# Altium PCB PCB1.PcbDoc
Units mm, origin at the board's own origin, x right, y up, seen from the top; angles counter-clockwise.
Board outline 152.4 x 101.6 mm, 2 copper layers (Top Layer, Bottom Layer); 18 components, 9 nets, 37 pads, 0 vias.
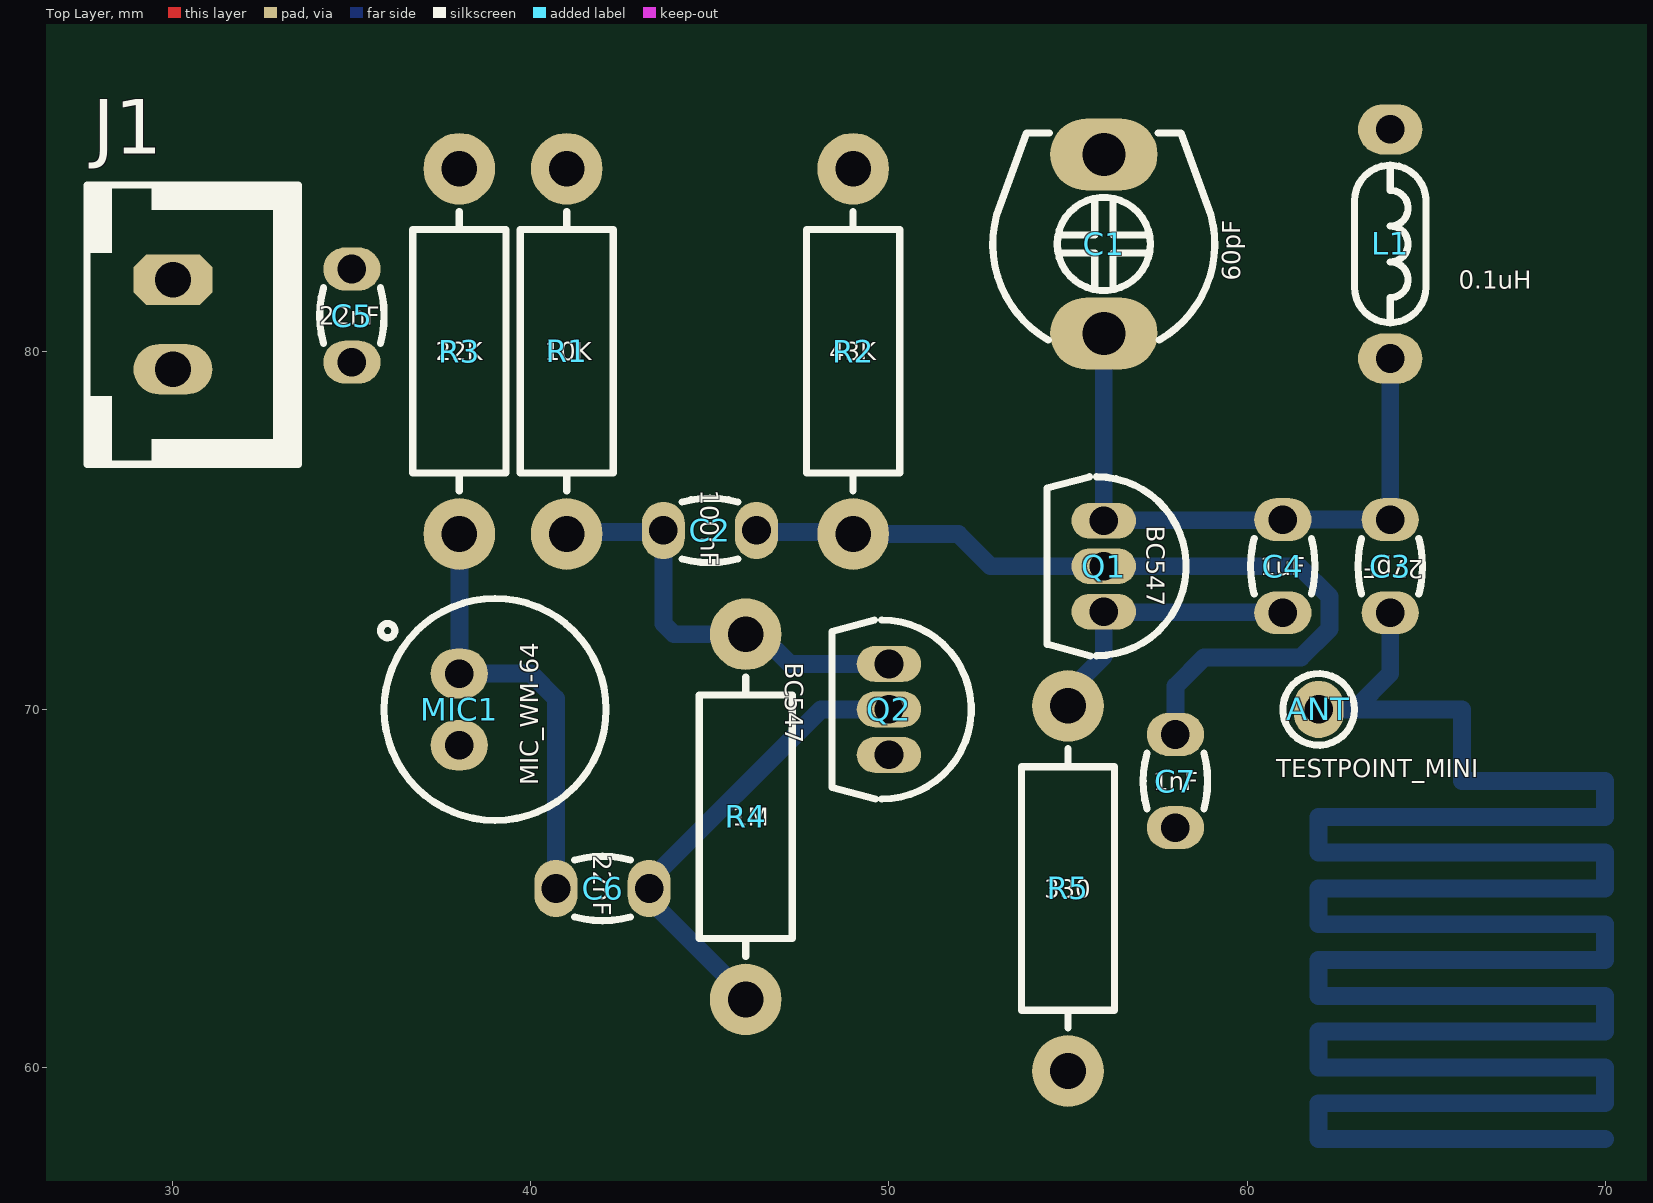
[diagram p0: Top Layer view]
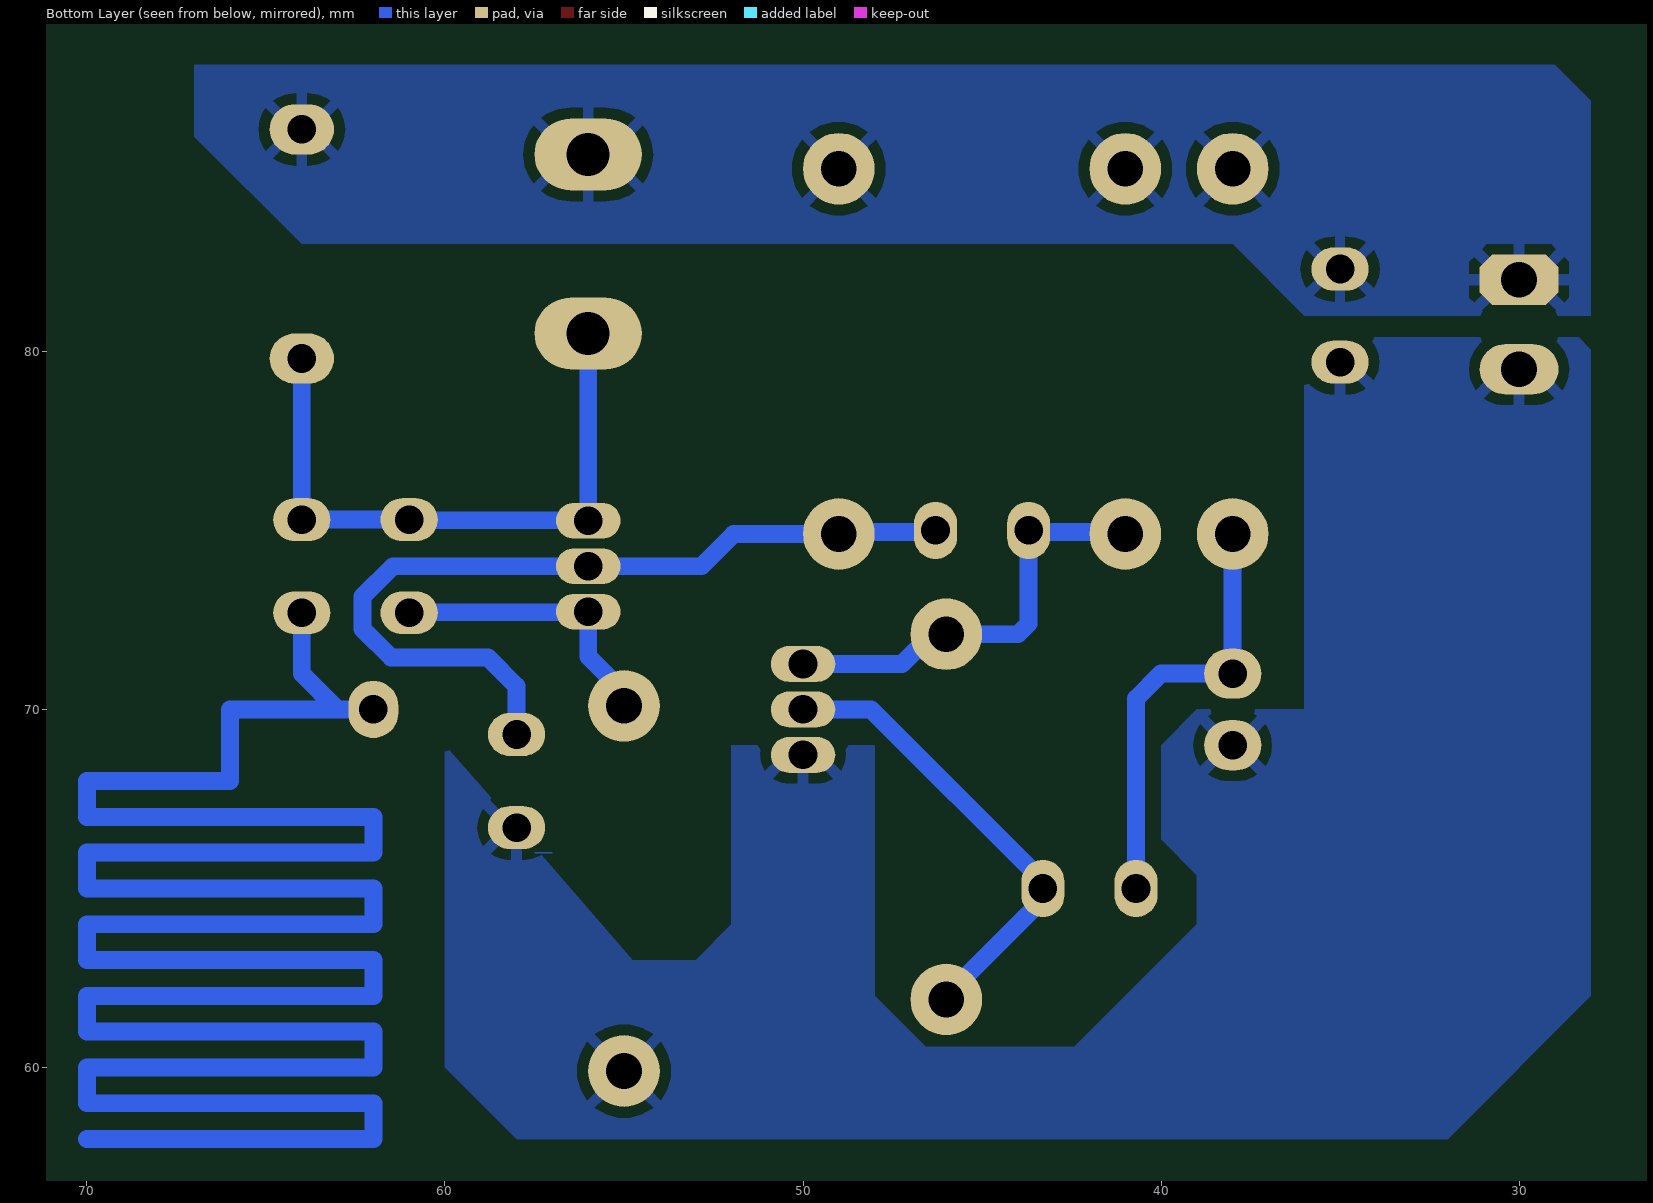
[diagram p1: Bottom Layer view, seen from below]
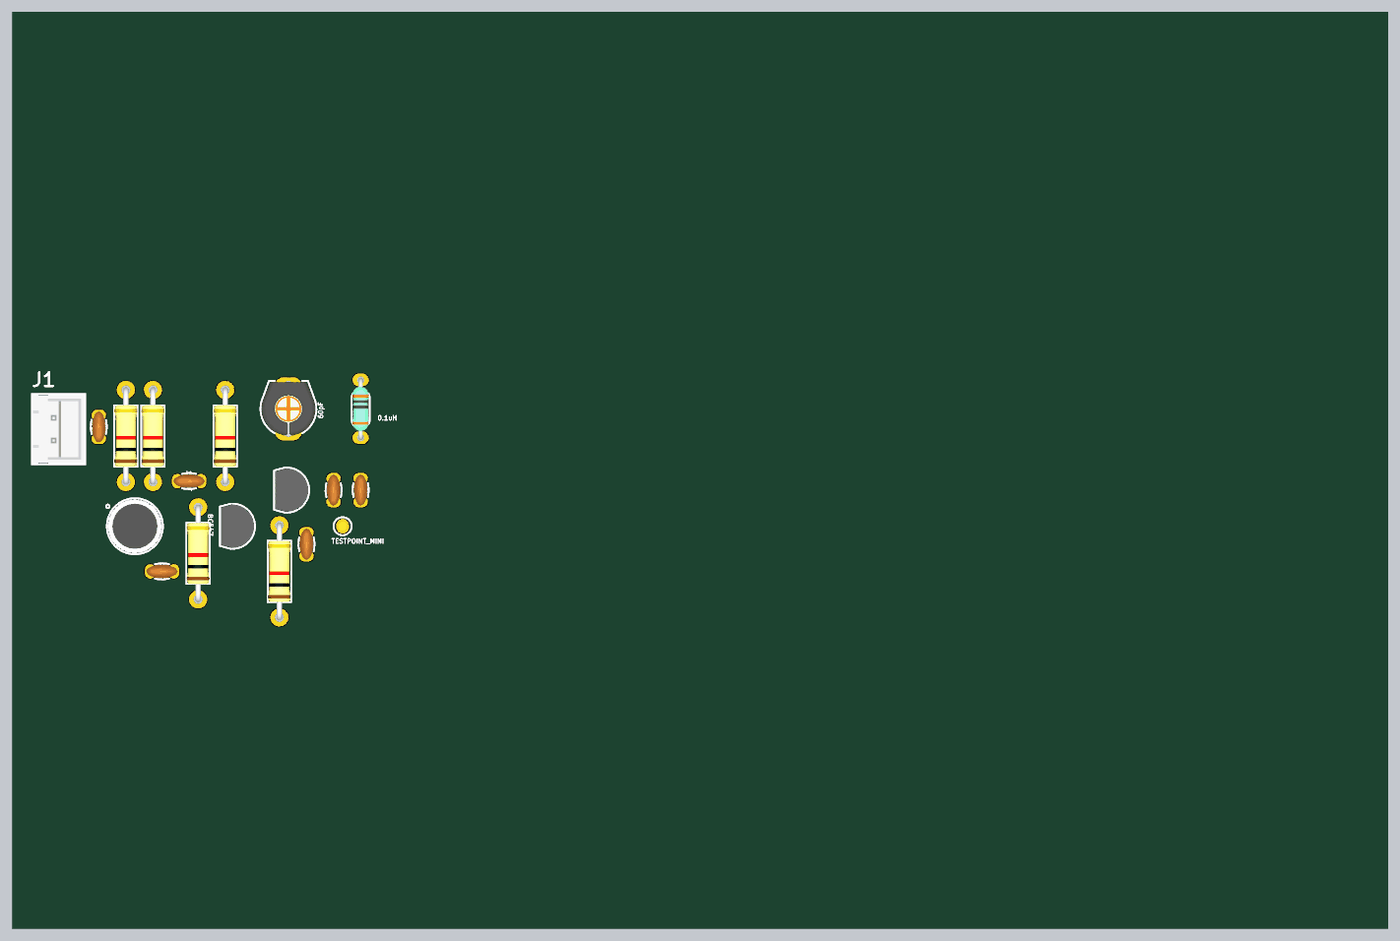
[diagram p2: 3D render of the assembled board from above, using the file's embedded part models]

## Layer stack, top to bottom
Top Solder: solder mask 0.0102, Solder Resist, Dk 3.5
Top Layer: signal copper 0.0356
Dielectric 1: dielectric 0.32, FR-4, Dk 4.8
Bottom Layer: signal copper 0.0356
Bottom Solder: solder mask 0.0102, Solder Resist, Dk 3.5

## Board outline
25.4,25.4 177.8,25.4 177.8,127 25.4,127

## Design rules (kind name [scope] priority, off if disabled: settings)
Clearance [All] p1: gap=0.25 ignorepadtopadclearanceinfootprint=FALSE except(0: Arc-Hole Track-Hole SMDPad-Hole THPad-Hole Via-Hole Fill-Hole Poly-Hole Region-Hole Text-Hole; 0.2: Arc-Text Track-Text SMDPad-Text THPad-Text Via-Text Fill-Text Poly-Text Region-Text Text-Text)
PolygonConnect [All] p1: thpad.connectstyle=Relief thpad.reliefconductorwidth=0.3 thpad.reliefentries=4 thpad.polygonreliefangle="90 Angle" thpad.airgapwidth=0.3 thpad.conductorbypadedge=TRUE thpad.mindistance=0.381 thpad.enablemindistance=FALSE smdpad.connectstyle=Relief smdpad.reliefconductorwidth=0.3 smdpad.reliefentries=4 smdpad.polygonreliefangle="90 Angle" smdpad.airgapwidth=0.3 smdpad.conductorbypadedge=TRUE smdpad.mindistance=0.381 smdpad.enablemindistance=FALSE via.connectstyle=Direct via.reliefconductorwidth=0.254 via.reliefentries=4 via.polygonreliefangle="90 Angle" via.airgapwidth=0.254
RoutingVias [All] p1: holewidth=0.711 width=1.27 viastyle="Through Hole" minholewidth=0.711 minwidth=1.27 maxholewidth=0.711 maxwidth=1.27
SolderMaskExpansion [All] p1: expansion=0.102 istentingtop=FALSE
Width [All] p1: maxlimit=1.5 minlimit=0.3 preferedwidth=0.5 minimp=50.000000 maximp=50.000000 favimp=50.000000
30 further rules are at their usual default settings.

## Classes and differential pairs
component class Sheet1: ANT C1 C2 C3 C4 C5 C6 C7 L1 MIC1 Q1 Q2 R1 R2 R3 R4 R5

## Components (designator, comment, footprint, x,y, rotation, side; value= is the part's Value field where it differs from the comment)
ANT "TESTPOINT_MINI" TPTHD_A 62,70 r0 top value=VALUE
C1 "60pF" CTRM_6X6 56,83 r90 top
C2 "100nF" C_CERM_D3 45,75 r180 top
C3 "27pF" C_CERM_D3 64,74 r90 top
C4 "1uF" C_CERM_D3 61,74 r270 top
C5 "22nF" C_CERM_D3 35,81 r270 top
C6 "22nF" C_CERM_D3 42,65 r180 top
C7 "1nF" C_CERM_D3 58,68 r90 top
J1 "HHDR_2" XH_2 30,80.75 r270 top
L1 "0.1uH" LT_AX025 64,83 r270 top
MIC1 "MIC_WM-64" MIC_C6 39,70 r0 top
Q1 "BC547" TO92_3 56,74 r270 top
Q2 "BC547" TO92_3 50,70 r270 top
R1 "10K" R025W_AX04 41,80 r90 top
R2 "43K" R025W_AX04 49,80 r90 top
R3 "22K" R025W_AX04 38,80 r90 top
R4 "1M" R025W_AX04 46,67 r90 top
R5 "330" R025W_AX04 55,65 r90 top

## Footprints (in the part's own frame and the unit in brackets; to place one, negate y for a bottom-side part, rotate by r counter-clockwise, add the part's x,y. Pads: shape width x height; smd on the part's side, far side on the other; paste and mask are expansions set on the pad)
C_CERM_D3 [mm] "CAP, CER MULTILAYER, D:3.5mm, pitch: 2.54mm"
  oval 1.2x1.6 hole 0.8: 1(-1.3,0) 2(1.3,0)
  silkscreen extent -0.78,-0.9 0.78,0.9, body extent -1.75,-0.75 1.75,0.75, height 4
CTRM_6X6 [mm] "CAP, TRIMMER, Murata TZ03"
  oval 2x3 hole 1.2: 1(-2.5,0) 2(2.5,0)
  silkscreen extent -2.68,-3.1 3.1,3.1, body extent -3,-3 3,3, height 4.8
LT_AX025 [mm] "INDUCTOR, Axial, 6.4mm,"
  oval 1.4x1.8 hole 0.8 mask+0.1: 1(-3.2,0) 2(3.2,0)
  silkscreen extent -2.2,-1 2.2,1, body extent -3.43,-0.92 3.43,0.92, height 1.92
MIC_C6 [mm] "MIC, WM-63PR, POM-3535P-3-R"
  oval 1.6x1.4 hole 0.8: 1(-1,1) 2(-1,-1)
  silkscreen extent -3.2,-3.1 3.1,3.1, body extent -3,-3 3,3, height 2.4
R025W_AX04 [mm] "RESISTOR 1/4 WATT, AXIAL0.4"
  round 2 hole 1: 1(-5.1,0) 2(5.1,0)
  silkscreen extent -3.9,-1.3 3.9,1.3, body extent -5.38,-1.28 5.38,1.28, height 2.6
TO92_3 [mm] "TO-92, SOT54"
  oval 1x1.8 hole 0.8 mask+0.1: 1(-1.27,0) 2(0,0) 3(1.27,0)
  silkscreen extent -2.5,-1.59 2.5,2.3, body extent -2.38,-1.45 2.38,2.18, height 7.82
TPTHD_A [mm] "TEST POINT, SMALLEST SIZE"
  oval 1.4x1.6 hole 0.8: 1(0,0)
  silkscreen extent -1,-1 1,1, body extent -0.5,-0.5 0.5,0.5, height 6.5
XH_2 [mm] "PW10-x-M, JST-BxB-XH-A pitch: 2.5mm, 3A/250v"
  oct 1.4x2.2 hole 1: 1(-1.25,0)
  oval 1.4x2.2 hole 1: 2(1.25,0)
  silkscreen extent -3.9,-2.4 3.9,3.5, body extent -3.75,-2.3 3.75,3.4, height 7

## Part data
ANT: "TEST POINT", MANF=MANF, MANF_P#=MANF_P#
C1: library part CAP_THD_TRIMMER, "CAP, THD, TRIMMER", ASSEMBLY=ASSEMBLY, DESC="CAP, SMD, TRIMMER", MANF=MANF, MANF_P#=MANF_PART#, PARAM=PARAM, PARAM2=PARAM2, PRICE="100= 1$"
C2 C3 C4 C5 C6 C7: library part CAP_THD_CER, "CAP, THD, CER MULTI LAYER,", ASSEMBLY=ASSEMBLY, DESC="CAP, CER MULTI LAYER,", MANF=MANF, MANF_P#=MANF_PART#, PARAM2=50V, PRICE="100= 1$"
J1: library part XH_2, "JST-XH pitch: 2.5mm"
L1: library part IND_THD, "INDUCTOR, THD"
MIC1: "MICROPHONE OMNI 6X2.2MM W/CAP 2.2KOHM -44DB TH", MANF_P#=WM-64PNT, PRICE=PRICE
Q1 Q2: library part NPN_BC547_TO92, "BJT, NPN, 45v, 0.1A, THD, TO92", MANF=FAIRCHILD, MANF_P#=BC547, PARAM="0.1A, Hfe110~800", PARAM2="45v, 500mW"
R1 R2 R3 R4 R5: library part RES_THD, "RESISTOR, THD", ASSEMBLY=ASSEMBLY, DESC=DESCRIPTION, DIST#=MOUSER, MANF="KOA SPEER", MANF_P#=RK73H1ETTP4701F, PARAM=0.063W, PARAM2=1%, PRICE="100= 0.5$"

## Nets (pads, with @x,y where several pads share a name; then routed paths per layer and width w, separated by ;. In a path a pad name is that pad's centre, name@x,y a point inside that pad or via, vN(x,y) a via of type N, cw(c..) or ccw(c..) an arc to the next point about the centre after c; other vN are vias at no path point)
ANT: ANT.1 C3.1 | length 103.1
  Bottom Layer w0.5: ANT.1 63,70 ; C3.1 64,71 63,70 ; 70,58 62,58 62,59 70,59 70,60 62,60 62,61 70,61 70,62 62,62 62,63 70,63 70,64 62,64 62,65 70,65 70,66 62,66 62,67 70,67 70,68 66,68 66,70 63,70
GND: C5.2 C7.1 J1.2 MIC1.2 Q2.3 R5.1
NetC1_1: C1.1 C3.2 C4.1 L1.2 Q1.1 | length 17.7
  Bottom Layer w0.5: C1.1 Q1.1 56.015,75.285 60.985,75.285 C4.1 C3.2 L1.2
NetC2_1: C2.1 C7.2 Q1.2 R2.1 | length 24
  Bottom Layer w0.5: C2.1 46.35,74.95 48.95,74.95 R2.1 51.937,74.9 52.837,74 Q1.2 61.456,74 62.3,73.156 62.3,72.244 61.503,71.447 58.797,71.447 58,70.65 C7.2
NetC2_2: C2.2 Q2.1 R1.1 R4.2 | length 12.1
  Bottom Layer w0.5: R1.1 41.05,74.95 43.65,74.95 C2.2 43.7,72.393 43.993,72.1 R4.2 46.406,72.1 47.236,71.27 Q2.1
NetC4_2: C4.2 Q1.3 R5.2 | length 8.1
  Bottom Layer w0.5: R5.2 55,70.48 56,71.48 Q1.3 56.015,72.715 60.985,72.715 C4.2
NetC6_1: C6.1 Q2.2 R4.1 | length 13.1
  Bottom Layer w0.5: R4.1 46,62 43.3,64.7 C6.1 43.3,65.2 48.1,70 Q2.2
NetC6_2: C6.2 MIC1.1 R3.1 | length 12.2
  Bottom Layer w0.5: R3.1 MIC1.1 40,71 40.7,70.3 C6.2
VCC: C1.2 C5.1 J1.1 L1.1 R1.2 R2.2 R3.2

## Polygon pours and split planes (outlines as drawn)
no net on Bottom Layer "NONET_L02_P002" (solid, pour order 2): 57,66 57.5,66
GND on Bottom Layer "GND_L02_P001" (solid, pour order 1): 60,69 60,60 58,58 32,58 28,62 28,80.051 28.341,80.392 35.831,80.392 36.035,80.188 36,80.154 36,70 39,70 40,69 40,66.372 39,65.372 39,64 42.425,60.575 46.575,60.575 48,62 48,69 52,69 52,64 53,63 54.75,63
VCC on Bottom Layer "VCC_L02_P000" (solid, pour order 0): 28,81 36,81 38,83 64,83 67,86 67,88 29,88 28,87

## Silkscreen, mask and mechanical layers (free items; w line width, h text height)
Top Overlay:
  drawing of 136 lines, arcs and shapes, not listed